# Altium PCB Smart Grid PCB.PcbDoc
Units mm, origin at the board's own origin, x right, y up, seen from the top; angles counter-clockwise.
Board outline 152.4 x 101.6 mm, 2 copper layers (Top Layer, Bottom Layer); 36 components, 24 nets, 76 pads, 0 vias.
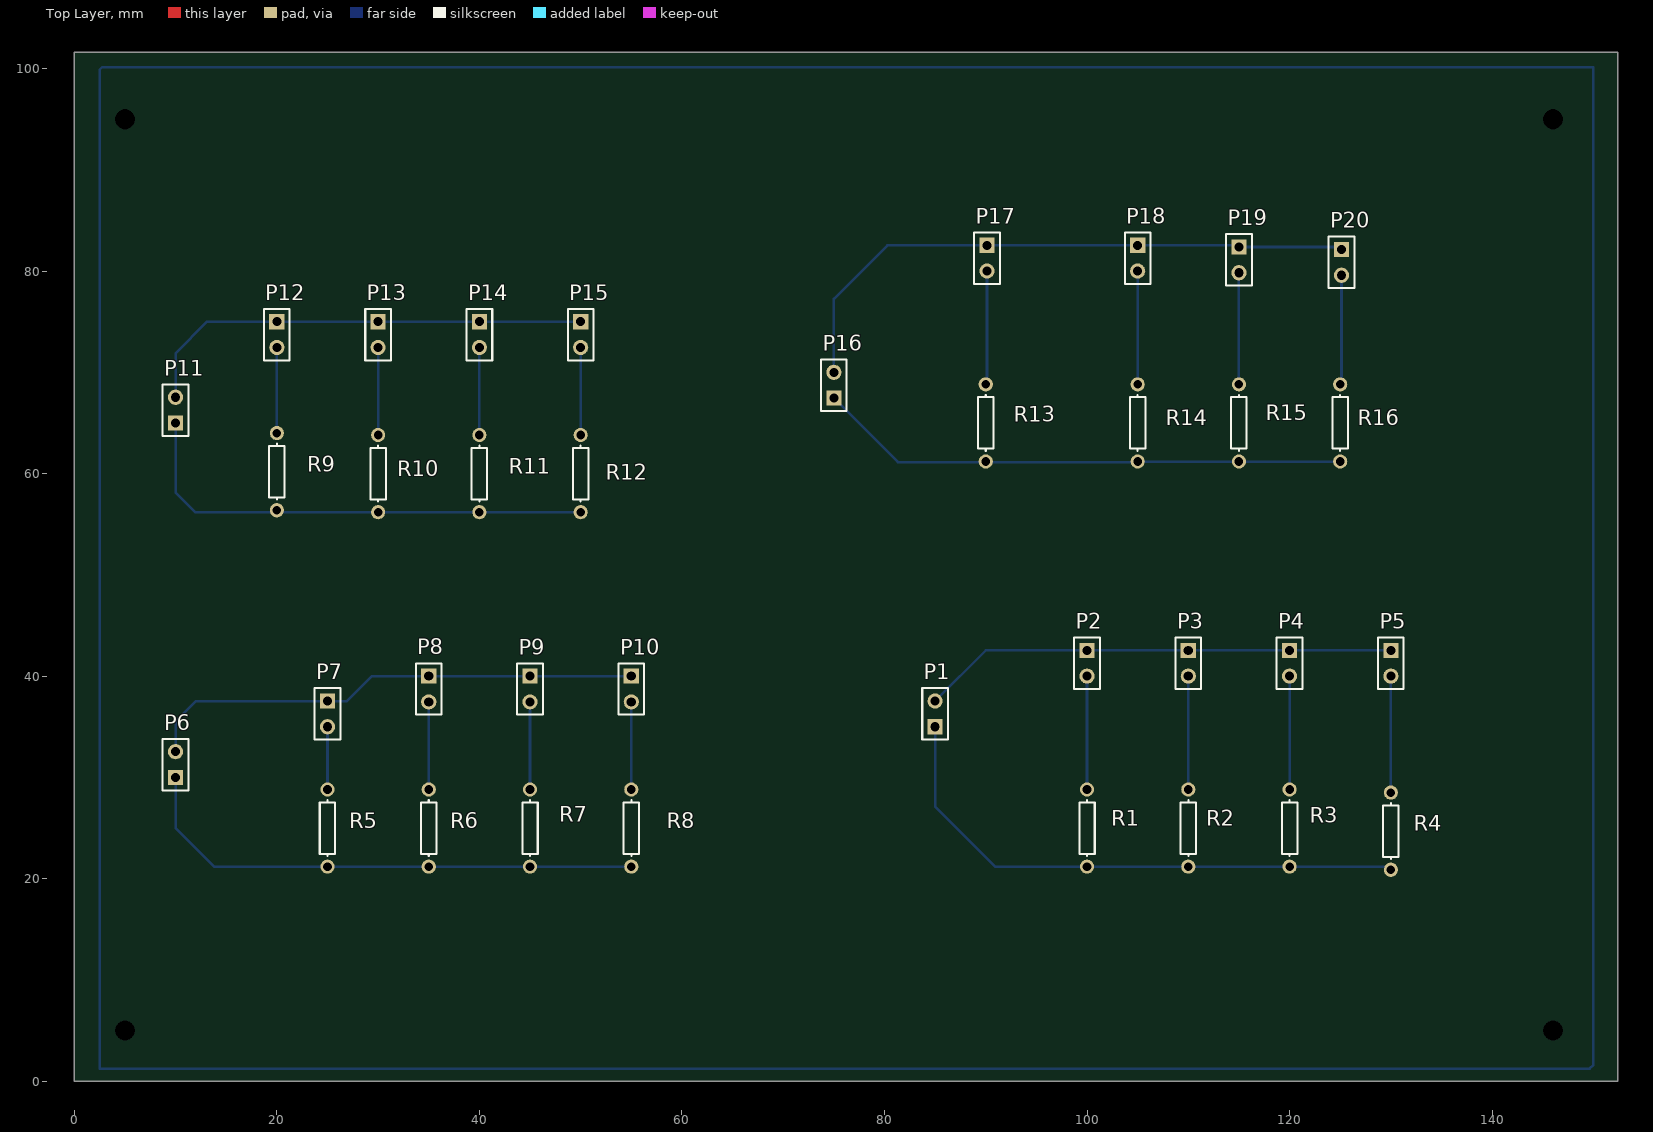
[diagram p0: Top Layer view]
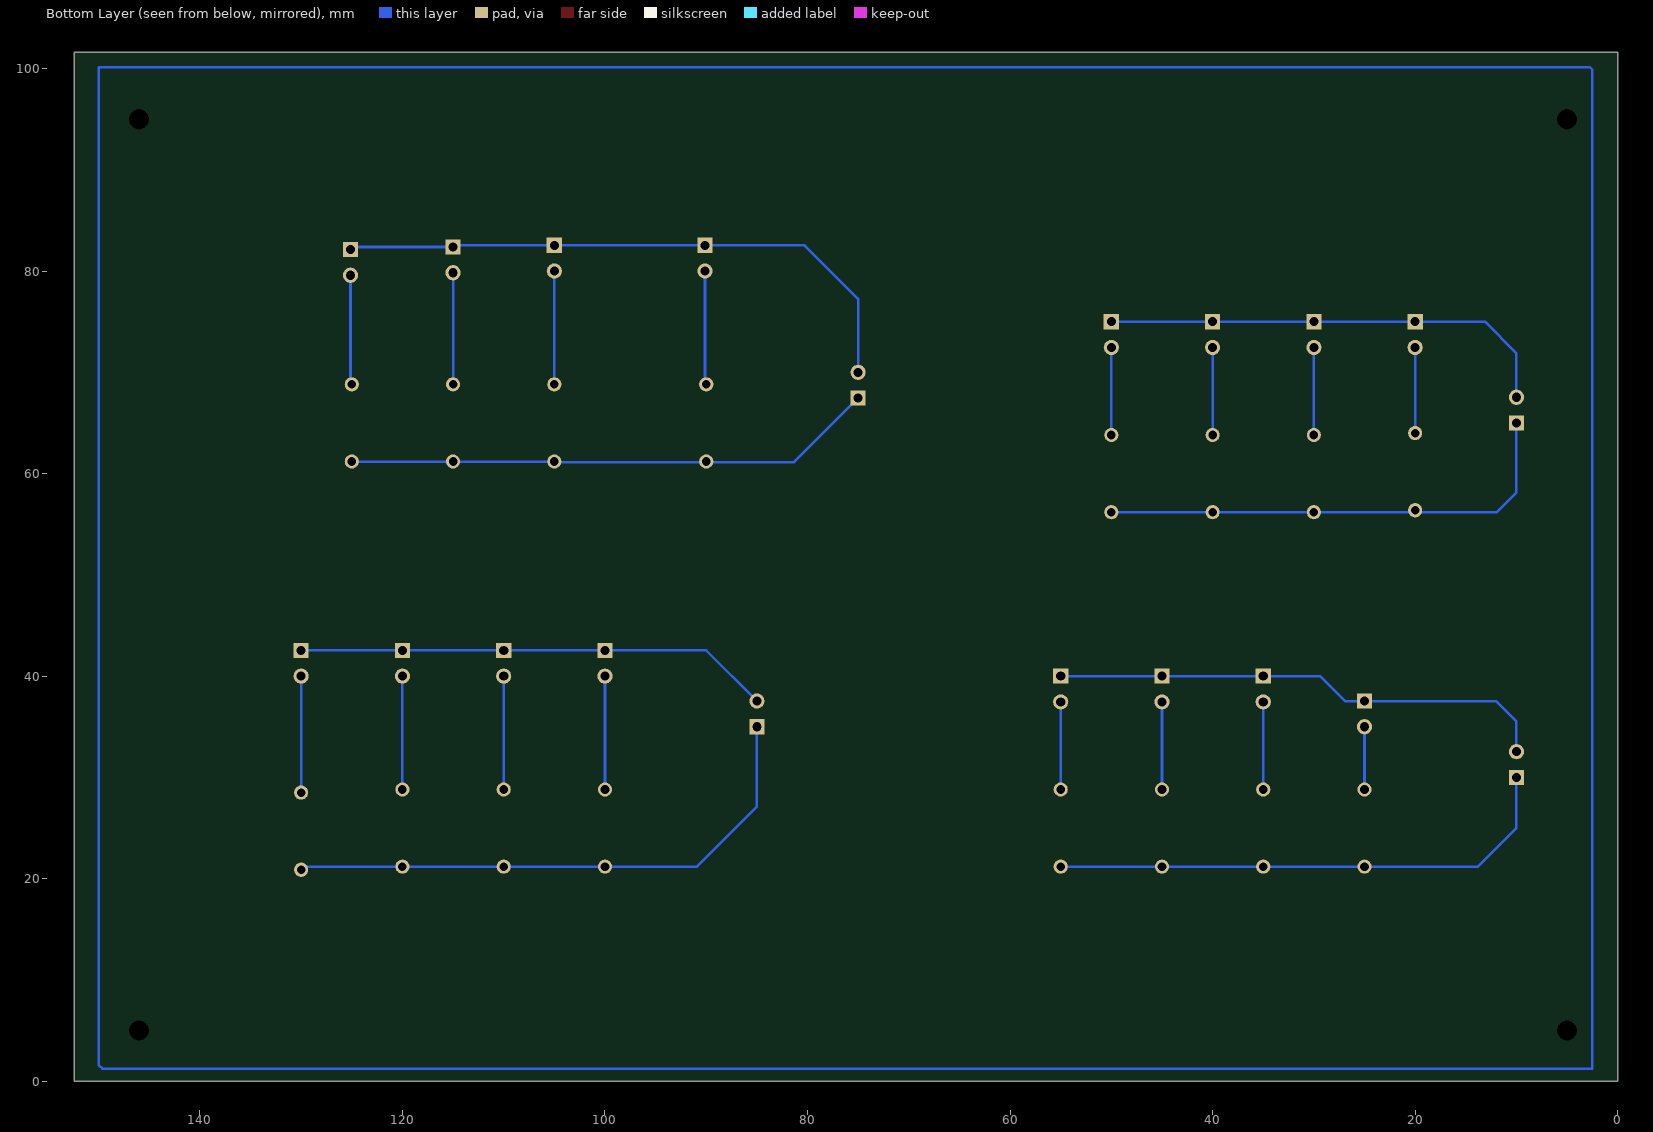
[diagram p1: Bottom Layer view, seen from below]

## Layer stack, top to bottom
Top Solder: solder mask 0.0102, Solder Resist, Dk 3.5
Top Layer: signal copper 0.0356
Dielectric1: dielectric 0.32, FR-4, Dk 4.8
Bottom Layer: signal copper 0.0356
Bottom Solder: solder mask 0.0102, Solder Resist, Dk 3.5

## Board outline
0,0 0,101.6 152.4,101.6 152.4,0

## Design rules (kind name [scope] priority, off if disabled: settings)
Clearance [All] p1: gap=0.254
FabricationTestPointUsage TestPointUsage [All] p1: valid=0 allowmultiple=FALSE
FabricationTestpoint Testpoint [All] p1: side=3 testpointundercomponent=TRUE minsize=1.016 maxsize=2.54 preferedsize=1.524 minholesize=0 maxholesize=1.016 preferedholesize=0.813 testpointgrid=0.025 allowsidetop=TRUE allowsidebottom=TRUE usegrid=TRUE gridtolerance=0
PolygonConnect [All] p1: connectstyle=Relief reliefconductorwidth=0.254 reliefentries=4 polygonreliefangle="90 Angle" airgapwidth=0.254
RoutingVias [All] p1: holewidth=0.711 width=1.27 viastyle="Through Hole" minholewidth=0.711 minwidth=1.27 maxholewidth=0.711 maxwidth=1.27
SilkToSolderMaskClearance SilkscreenOverComponentPads [IsPad] p1: minsilkscreentomaskgap=0.229 clearancetoexposedcopper=TRUE
SolderMaskExpansion [All] p1: expansion=0.102
Width Width_1 [All] p1: maxlimit=0.254 minlimit=0.254 preferedwidth=0.254
Width Width_Power [(InNet('GND1') OR InNet('GND2') OR InNet('GND3') OR InNet('GND4') OR InNet('VRASPI1') OR InNet('VRASPI2') OR InNet('VRASPI3') OR InNet('VRASPI4'))] p2: maxlimit=0.5 minlimit=0.25 preferedwidth=0.5 minimp=50.000000 maximp=50.000000 favimp=50.000000
27 further rules are at their usual default settings.

## Components (designator, comment, footprint, x,y, rotation, side; value= is the part's Value field where it differs from the comment)
P1 "Vin1" HDR1X2 85,35 r90 top
P2 "Header 2" HDR1X2 100,42.54 r270 top
P3 "Header 2" HDR1X2 110,42.54 r270 top
P4 "Header 2" HDR1X2 120,42.54 r270 top
P5 "Header 2" HDR1X2 130,42.54 r270 top
P6 "Vin2" HDR1X2 10,30 r90 top
P7 "Header 2" HDR1X2 25,37.54 r270 top
P8 "Header 2" HDR1X2 35,40 r270 top
P9 "Header 2" HDR1X2 45,40 r270 top
P10 "Header 2" HDR1X2 55,40 r270 top
P11 "Vin3" HDR1X2 10,65 r90 top
P12 "Header 2" HDR1X2 20,75 r270 top
P13 "Header 2" HDR1X2 30,75 r270 top
P14 "Header 2" HDR1X2 40,75 r270 top
P15 "Header 2" HDR1X2 50,75 r270 top
P16 "Vin4" HDR1X2 75,67.46 r90 top
P17 "Header 2" HDR1X2 90.125,82.54 r270 top
P18 "Header 2" HDR1X2 105,82.54 r270 top
P19 "Header 2" HDR1X2 115,82.375 r270 top
P20 "Header 2" HDR1X2 125.125,82.125 r270 top
R1 "Res1" AXIAL-0.3 100,25 r90 top
R2 "Res1" AXIAL-0.3 110,25 r90 top
R3 "Res1" AXIAL-0.3 120,25 r90 top
R4 "Res1" AXIAL-0.3 130,24.69 r90 top
R5 "Res1" AXIAL-0.3 25,25 r90 top
R6 "Res1" AXIAL-0.3 35,25 r90 top
R7 "Res1" AXIAL-0.3 45,25 r90 top
R8 "Res1" AXIAL-0.3 55,25 r90 top
R9 "Res1" AXIAL-0.3 20,60.19 r90 top
R10 "Res1" AXIAL-0.3 30,60 r90 top
R11 "Res1" AXIAL-0.3 40,60 r90 top
R12 "Res1" AXIAL-0.3 50,60 r90 top
R13 "Res1" AXIAL-0.3 90,65 r90 top
R14 "Res1" AXIAL-0.3 105,65 r90 top
R15 "Res1" AXIAL-0.3 115,65 r90 top
R16 "Res1" AXIAL-0.3 125,65 r90 top

## Footprints (in the part's own frame and the unit in brackets; to place one, negate y for a bottom-side part, rotate by r counter-clockwise, add the part's x,y. Pads: shape width x height; smd on the part's side, far side on the other; paste and mask are expansions set on the pad)
AXIAL-0.3 [mm] "Axial Device, Thru-Hole; 2 Leads; 0.3 in Pin Spacing"
  round 1.4 hole 0.85: 1(-3.81,0) 2(3.81,0)
  silkscreen extent -2.77,-0.76 2.77,0.76
HDR1X2 [mm] "Connector; Header; 2 Position"
  rect 1.5x1.5 hole 0.9: 1(0,0)
  round 1.5 hole 0.9: 2(2.54,0)
  silkscreen extent -1.27,-1.27 3.81,1.27

## Part data
P1 P6 P11 P16: library part "Header 2", "Header, 2-Pin"
P2 P3 P4 P5 P7 P8 P9 P10 P12 P13 P14 P15 P17 P18 P19 P20: "Header, 2-Pin"
R1 R2 R3 R4 R5 R6 R7 R8 R9 R10 R11 R12 R13 R14 R15 R16: "Resistor"

## Free pads (board coordinates)
  round 1.524 hole 2 unplated: 0(5,95) 1(146,95) 2(146,5) 3(5,5)

## Nets (pads, with @x,y where several pads share a name; then routed paths per layer and width w, separated by ;. In a path a pad name is that pad's centre, name@x,y a point inside that pad or via, vN(x,y) a via of type N, cw(c..) or ccw(c..) an arc to the next point about the centre after c; other vN are vias at no path point)
GND1: P1.1 R1.1 R2.1 R3.1 R4.1 | length 55.3
  Bottom Layer w0.254: P1.1 85,27.125 90.935,21.19 R1.1 R2.1 R3.1 R4.1@130,21.19
GND2: P6.1 R5.1 R6.1 R7.1 R8.1 | length 51.6
  Bottom Layer w0.254: P6.1 10,25 13.81,21.19 R5.1 R6.1 R7.1 R8.1
GND3: P11.1 R9.1 R10.1 R11.1 R12.1 | length 47.7
  Bottom Layer w0.254: P11.1 10,58.125 11.935,56.19 20,56.19 R10.1 R11.1 R12.1
GND4: P16.1 R13.1 R14.1 R15.1 R16.1 | length 52.7
  Bottom Layer w0.254: P16.1 81.335,61.125 104.935,61.125 R14.1 R15.1 R16.1
NetP2_2: P2.2 R1.2 | length 11.2
  Bottom Layer w0.254: R1.2 P2.2
NetP3_2: P3.2 R2.2 | length 11.2
  Bottom Layer w0.254: R2.2 P3.2
NetP4_2: P4.2 R3.2 | length 11.2
  Bottom Layer w0.254: R3.2 P4.2
NetP5_2: P5.2 R4.2 | length 11.2
  Bottom Layer w0.254: R4.2@130,28.81 P5.2
NetP7_2: P7.2 R5.2 | length 6.2
  Bottom Layer w0.254: R5.2 P7.2
NetP8_2: P8.2 R6.2 | length 8.6
  Bottom Layer w0.254: R6.2 P8.2
NetP9_2: P9.2 R7.2 | length 8.6
  Bottom Layer w0.254: R7.2 P9.2
NetP10_2: P10.2 R8.2 | length 8.6
  Bottom Layer w0.254: R8.2 P10.2
NetP12_2: P12.2 R9.2 | length 8.7
  Bottom Layer w0.254: R9.2@20,63.81 P12.2
NetP13_2: P13.2 R10.2 | length 8.7
  Bottom Layer w0.254: R10.2 P13.2
NetP14_2: P14.2 R11.2 | length 8.7
  Bottom Layer w0.254: R11.2 P14.2
NetP15_2: P15.2 R12.2 | length 8.7
  Bottom Layer w0.254: R12.2 P15.2
NetP17_2: P17.2 R13.2 | length 11
  Bottom Layer w0.254: R13.2@90.125,69 P17.2
NetP18_2: P18.2 R14.2 | length 11.2
  Bottom Layer w0.254: R14.2 P18.2
NetP19_2: P19.2 R15.2 | length 11
  Bottom Layer w0.254: R15.2 P19.2
NetP20_2: P20.2 R16.2 | length 10.8
  Bottom Layer w0.254: R16.2 125.125,68.935 P20.2
VRASPI1: P1.2 P2.1 P3.1 P4.1 P5.1 | length 47.1
  Bottom Layer w0.254: P1.2 90,42.54 P2.1 P3.1 P4.1 P5.1
VRASPI2: P6.2 P7.1 P8.1 P9.1 P10.1 | length 49.8
  Bottom Layer w0.254: P6.2 10,35.5 12.04,37.54 P7.1 26.915,37.54 29.375,40 P8.1 P9.1 P10.1
VRASPI3: P11.2 P12.1 P13.1 P14.1 P15.1 | length 45.6
  Bottom Layer w0.254: P11.2 10,71.875 13.125,75 P12.1 P13.1 P14.1 P15.1
VRASPI4: P16.2 P17.1 P18.1 P19.1 P20.1 | length 59.7
  Bottom Layer w0.254: P16.2 75,77.25 80.29,82.54 P17.1 P18.1 114.835,82.54 P19.1 124.875,82.375 P20.1
copper on no net: | length 492.4
  Bottom Layer w0.254: 2.5,1.25 149.625,1.25 150,1.625 150,100.125 2.75,100.125 2.5,99.875 2.5,1.25

## Silkscreen, mask and mechanical layers (free items; w line width, h text height)
Mechanical 16:
  drawing of 1874 lines, arcs and shapes, not listed
  text "1" at -29.286,135.509 h1.78
  text "2" at 43.358,135.509 h1.78
  text "3" at 116.51,135.509 h1.78
  text "4" at 189.408,135.509 h1.78
  text "A" at -63.627,112.497 h1.78
  text "A" at 223.393,112.497 h1.78
  text "B" at -63.627,64.44 h1.78
  text "B" at 223.393,64.44 h1.78
  text "C" at 33.393,40.926 h1.78
  text "C" at -63.627,15.926 h1.78
  text "ENGINEER:" at 108.458,-21.082 h1.14
  text "TITLE:" at 146.558,-21.082 h1.14
  text "PCB DESIGNER:" at 108.458,-28.575 h1.14
  text "D" at -63.627,-32.08 h1.78
  text "D" at 223.393,-32.08 h1.78
  text "DATE:" at 108.458,-36.322 h1.14
  text "PART NO.:" at 146.558,-36.322 h1.14
  text "REV:" at 199.898,-36.322 h1.14
  text "Altium Limited" at 75.438,-38.862 h1.78
  text ".PRINT_DATE" at 109.728,-39.37 h1.78
  text "12a Rodborough Rd" at 75.438,-41.402 h1.78
  text "Frenchs Forest" at 75.438,-43.942 h1.78
  text "FILE NAME:" at 108.458,-43.942 h1.14
  text "DWG NO:" at 146.558,-43.942 h1.14
  text "SCALE:" at 199.898,-43.942 h1.14
  text "NSW 2086" at 75.438,-46.482 h1.78
  text ".PCB_FILE_NAME_NO_PATH" at 109.728,-46.99 h1.78
  text "1" at -29.286,-52.451 h1.78
  text "2" at 43.358,-52.451 h1.78
  text "3" at 116.51,-52.451 h1.78
  text "4" at 189.408,-52.451 h1.78